# Altium PCB V_7.PcbDoc
Units mm, origin at the board's own origin, x right, y up, seen from the top; angles counter-clockwise.
Board outline 152.4 x 101.6 mm, 2 copper layers (Top Layer, Bottom Layer); 6 components, 9 nets, 72 pads, 9 vias.
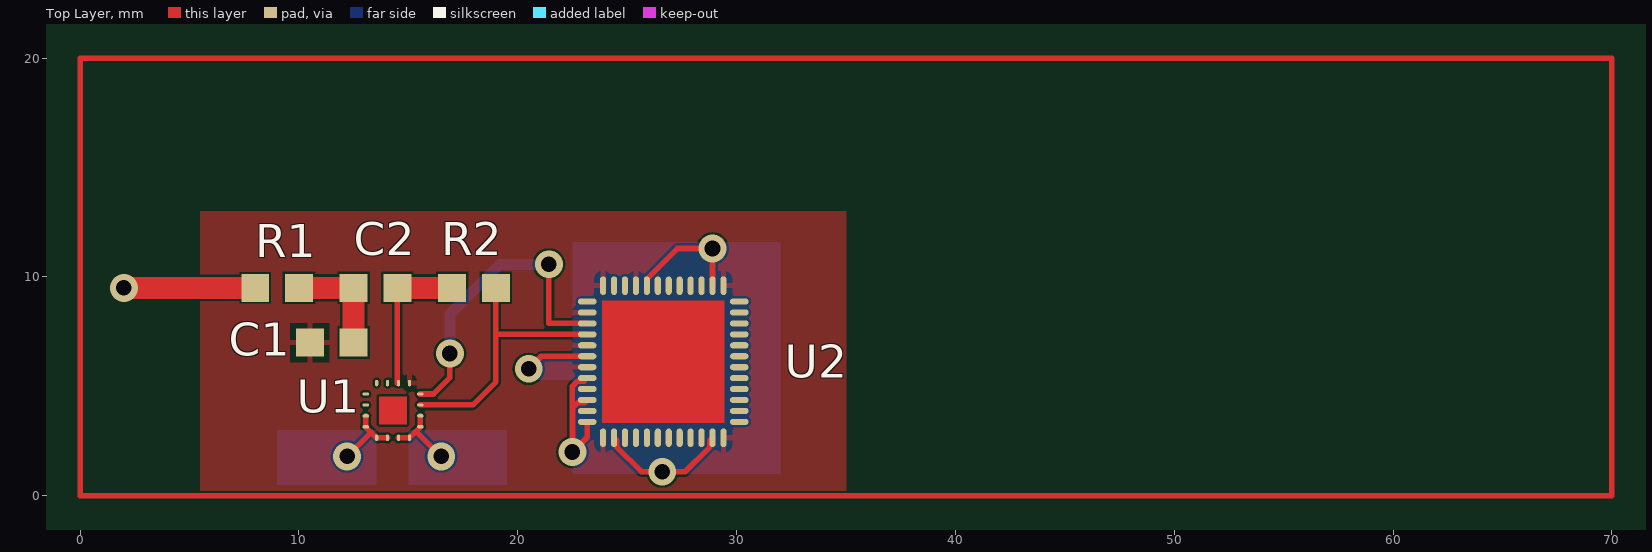
[diagram p0: Top Layer view]
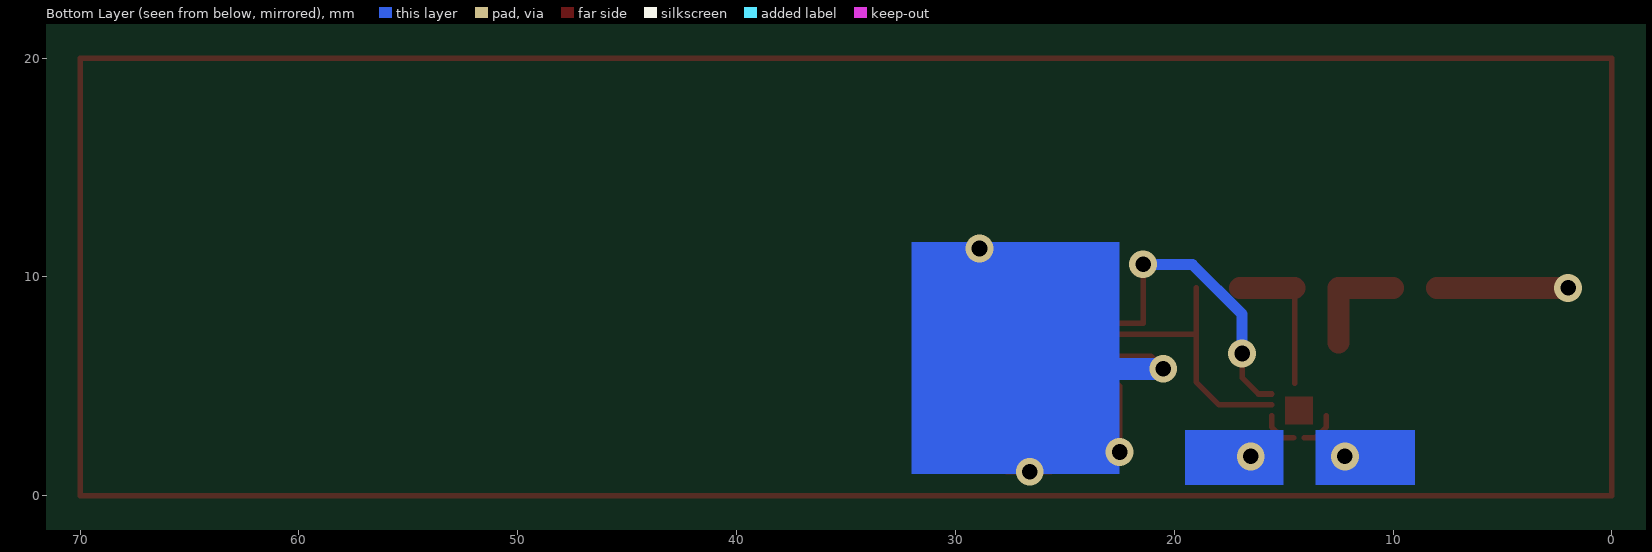
[diagram p1: Bottom Layer view, seen from below]

## Layer stack, top to bottom
Top Layer: signal copper 0.0356
Dielectric: core 0.32, FR-4, Dk 4.8
Bottom Layer: signal copper 0.0356

## Board outline
-37.846,-65.532 114.554,-65.532 114.554,36.068 -37.846,36.068

## Design rules (kind name [scope] priority, off if disabled: settings)
Clearance [All] p1: gap=0.1
PlaneConnect [All] p1: planeconnectstyle=Direct reliefexpansion=0.508 reliefentries=4 reliefconductorwidth=0.254 reliefairgap=0.254
PolygonConnect [All] p1: connectstyle=Relief reliefconductorwidth=0.254 reliefentries=4 polygonreliefangle="90 Angle" airgapwidth=0.254
RoutingVias [All] p1: holewidth=0.711 width=1.27 viastyle="Through Hole" minholewidth=0.711 minwidth=1.27 maxholewidth=0.711 maxwidth=1.27
SolderMaskExpansion [All] p1: expansion=0.102
Width [All] p1: maxlimit=1.5 minlimit=0.2 preferedwidth=1
27 further rules are at their usual default settings.

## Components (designator, comment, footprint, x,y, rotation, side; value= is the part's Value field where it differs from the comment)
C1 "2p" SMD 10.5,7 r0 top
C2 "2p2" SMD 12.5,9.5 r0 top
R1 "8k2" SMD 8,9.5 r0 top
R2 "2k" SMD 17,9.5 r0 top
U1 "ADA4932-1" ADA4932-1 14.3,3.9 r270 top (schematic designator 1)
U2 "ADS61B49" ADS61B49 29.4,9.6 r270 top (schematic designator 2)

## Footprints (in the part's own frame and the unit in brackets; to place one, negate y for a bottom-side part, rotate by r counter-clockwise, add the part's x,y. Pads: shape width x height; smd on the part's side, far side on the other; paste and mask are expansions set on the pad)
ADA4932-1 [mm]
  oval 0.3x0.15 smd: 1(-1.25,0.75) 2(-1.25,0.25) 3(-1.25,-0.25) 4(-1.25,-0.75) 9(1.25,-0.75) 10(1.25,-0.25) 11(1.25,0.25) 12(1.25,0.75)
  oval 0.15x0.3 smd: 5(-0.75,-1.25) 6(-0.25,-1.25) 7(0.25,-1.25) 8(0.75,-1.25) 13(0.75,1.25) 14(0.25,1.25) 15(-0.25,1.25) 16(-0.75,1.25)
  Top Layer region: -0.635,-0.636 0.635,-0.636 0.635,0.634 -0.635,0.634
ADS61B49 [mm]
  oval 0.85x0.28 smd: 1(0,0) 2(0,-0.5) 3(0,-1) 4(0,-1.5) 5(0,-2) 6(0,-2.5) 7(0,-3) 8(0,-3.5) 9(0,-4) 10(0,-4.5) 11(0,-5) 12(0,-5.5) 25(6.95,-5.5) 26(6.95,-5) 27(6.95,-4.5) 28(6.95,-4) 29(6.95,-3.5) 30(6.95,-3) 31(6.95,-2.5) 32(6.95,-2) 33(6.95,-1.5) 34(6.95,-1) 35(6.95,-0.5) 36(6.95,0)
  oval 0.28x0.85 smd: 13(0.725,-6.225) 14(1.225,-6.225) 15(1.725,-6.225) 16(2.225,-6.225) 17(2.725,-6.225) 18(3.225,-6.225) 19(3.725,-6.225) 20(4.225,-6.225) 21(4.725,-6.225) 22(5.225,-6.225) 23(5.725,-6.225) 24(6.225,-6.225) 37(6.225,0.725) 38(5.725,0.725) 39(5.225,0.725) 40(4.725,0.725) 41(4.225,0.725) 42(3.725,0.725) 43(3.225,0.725) 44(2.725,0.725) 45(2.225,0.725) 46(1.725,0.725) 47(1.225,0.725) 48(0.725,0.725)
  Top Layer region: 0.675,-5.55 6.275,-5.55 6.275,0.05 0.675,0.05
SMD [mm]
  rect 1.27x1.27 smd: 1(0,0) 2(2,0)

## Part data
C1 C2: library part CAP
R1 R2: library part RES

## Via types
v1: diameter 1.27, hole 0.711, Top Layer to Bottom Layer, 9 vias

## Nets (pads, with @x,y where several pads share a name; then routed paths per layer and width w, separated by ;. In a path a pad name is that pad's centre, name@x,y a point inside that pad or via, vN(x,y) a via of type N, cw(c..) or ccw(c..) an arc to the next point about the centre after c; other vN are vias at no path point)
3.3V: U2.2 U2.8 U2.18 U2.20 U2.22 U2.24 U2.26 U2.35 | length 27.1
  Top Layer w0.254: v1(20.5,5.8) 21.075,6.375 U2.18 ; U2.20@23.042,5.242 22.738,5.242 22.5,5.004 v1(22.5,2) v1@22.523,2.023 ; U2.24 23.175,2.675 v1@22.523,2.023 ; U2.22 23.042,4.242 22.738,4.242 22.523,4.027 v1@22.523,2.023 ; U2.26 24.533,2.517 24.533,2.213 25.646,1.1 v1(26.6,1.1) 27.654,1.1 28.767,2.213 28.767,2.517 U2.35 ; U2.8 25.9,9.904 27.296,11.3 v1(28.9,11.3) U2.2
  Bottom Layer w1: v1(20.5,5.8) 24.9,5.8
+5V: U1.7 U1.8 U1.9 U1.10 | length 3.3
  Top Layer w0.254: v1(12.2,1.8) 13.3,2.9 ; U1.7 U1.8 13.3,2.9 ; U1.10 U1.9 13.3,2.9
-5V: U1.11 U1.12 U1.13 U1.14 | length 3.4
  Top Layer w0.254: U1.11 U1.12 15.3,2.9 ; U1.14 U1.13 15.3,2.9 ; v1(16.5,1.8) 15.4,2.9 15.3,2.9
GND: C1.1 U1.1 U2.1 U2.9 U2.12 U2.14 U2.17 U2.19 U2.25 U2.36
Net1_2: C2.2 R2.1 U1.2 | length 6.8
  Top Layer w0.254: U1.2@14.5,5.15 C2.2
  Top Layer w1: C2.2 R2.1
Net1_15: R2.2 U1.15 U2.16 | length 12.3
  Top Layer w0.254: U1.15 17.95,4.15 19,5.2 R2.2 ; 19.025,7.375 U2.16
Net1_16: U1.16 U2.15 | length 14.5
  Top Layer w0.254: U1.16 16.15,4.65 16.9,5.4 v1(16.9,6.5) ; v1(21.425,10.575) 21.425,7.875 U2.15
  Bottom Layer w0.5: v1(16.9,6.5) 16.9,8.3 19.175,10.575 v1(21.425,10.575)
NetC1_2: C1.2 C2.1 R1.2 | length 5
  Top Layer w1: R1.2 C2.1 C1.2
NetR1_1: R1.1 | length 6
  Top Layer w1: v1(2,9.5) R1.1
pads on no net: U1.3 U1.4 U1.5 U1.6 U2.3 U2.4 U2.5 U2.6 U2.7 U2.10 U2.11 U2.13 U2.21 U2.23 U2.27 U2.28 U2.29 U2.30 U2.31 U2.32 U2.33 U2.34 U2.37 U2.38 U2.39 U2.40 U2.41 U2.42 U2.43 U2.44 U2.45 U2.46 U2.47 U2.48
copper on no net: | length 180
  Top Layer w0.254: 0,0 0,20 70,20 70,0 0,0

## Polygon pours and split planes (outlines as drawn)
GND on Top Layer "Top Layer-No Net" (solid, pour order 4): 5.5,13 35,13 35,0 5.5,0

## Other copper
Bottom Layer:
  rectangle net 3.3V: 22.5,1 32,11.6
  rectangle net -5V: 15,0.5 19.5,3
  rectangle net +5V: 9,0.5 13.55,3